# Altium PCB MoonPilor_Power.PcbDoc
Units mil, origin at the board's own origin, x right, y up, seen from the top; angles counter-clockwise.
Board outline 1968.5 x 2362.2 mil, 2 copper layers (Top Layer, Bottom Layer); 63 components, 43 nets, 344 pads, 140 vias.
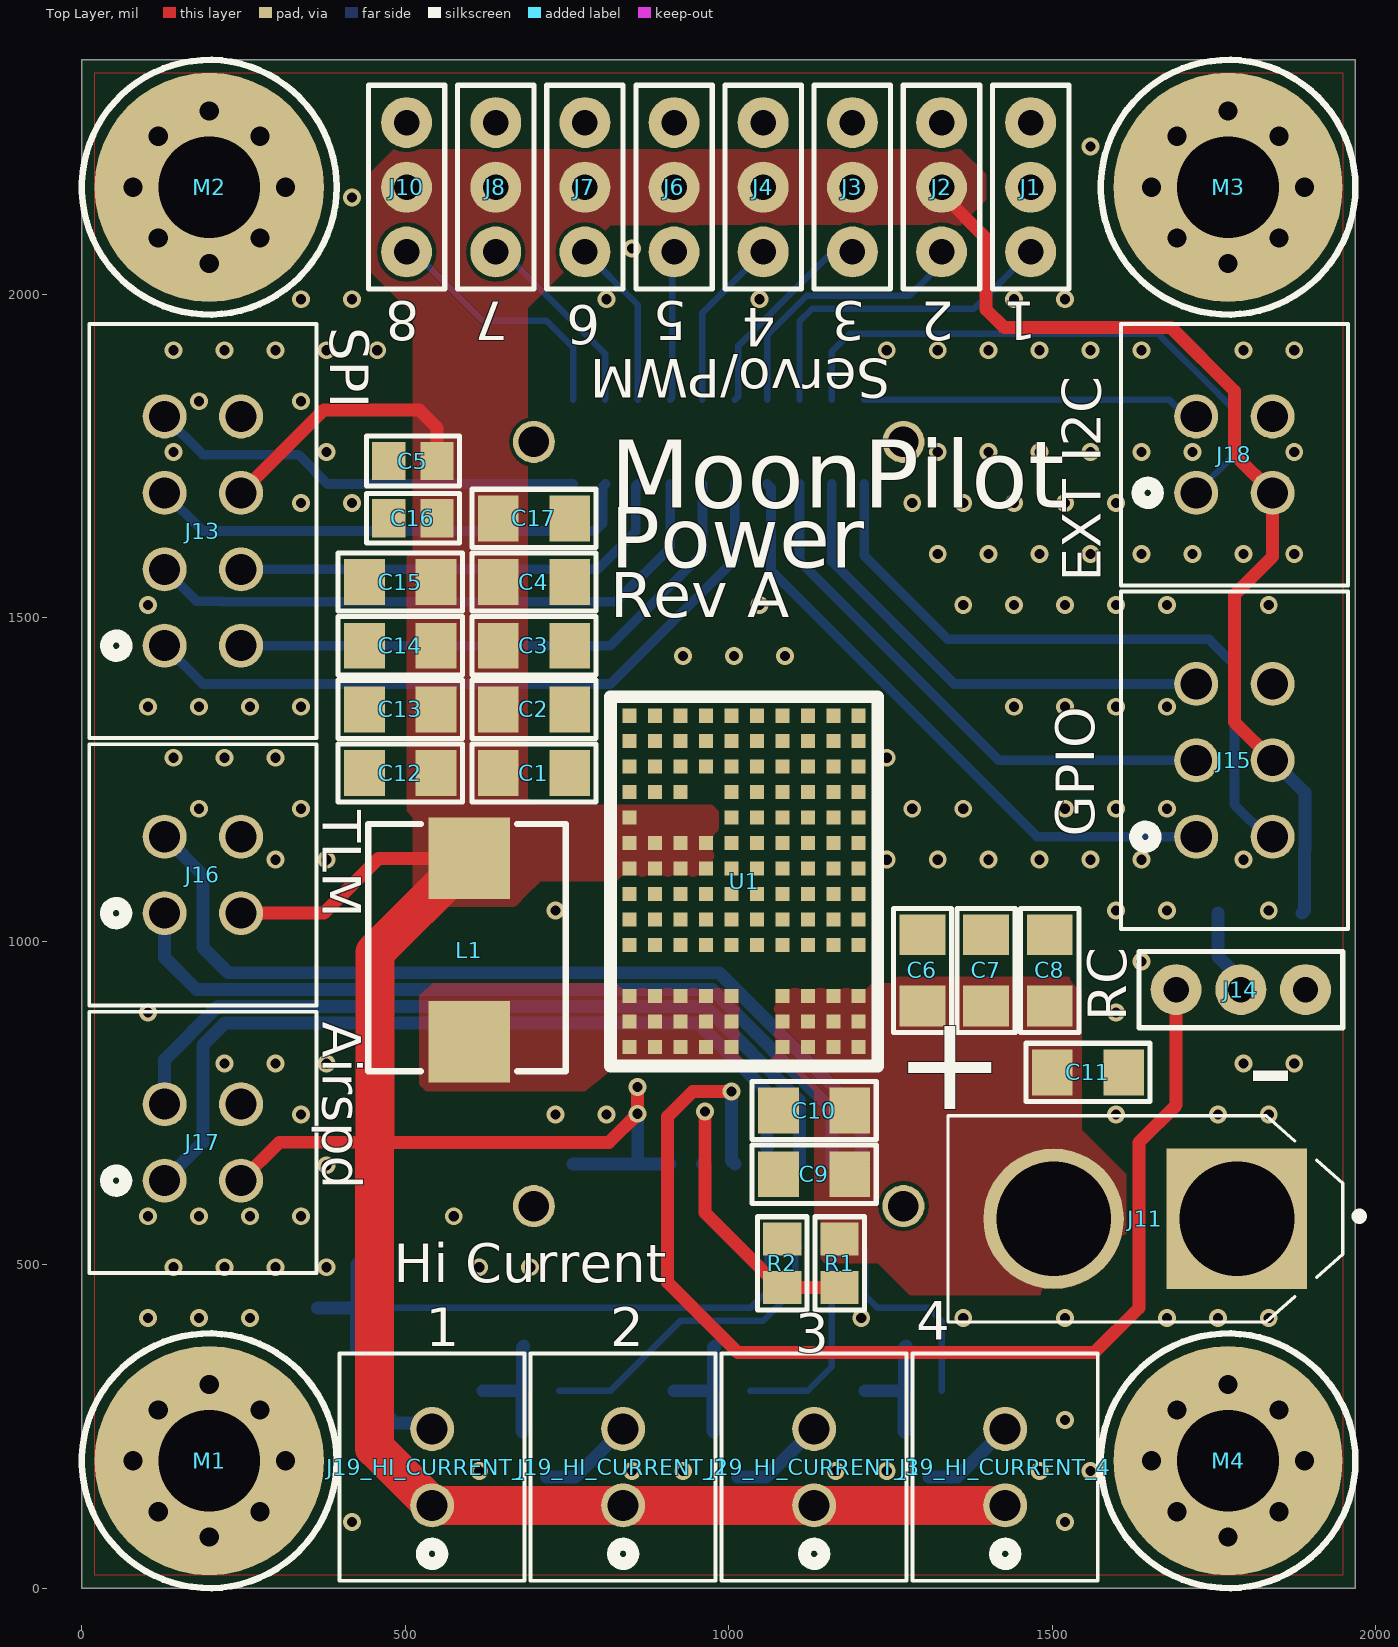
[diagram p0: Top Layer view]
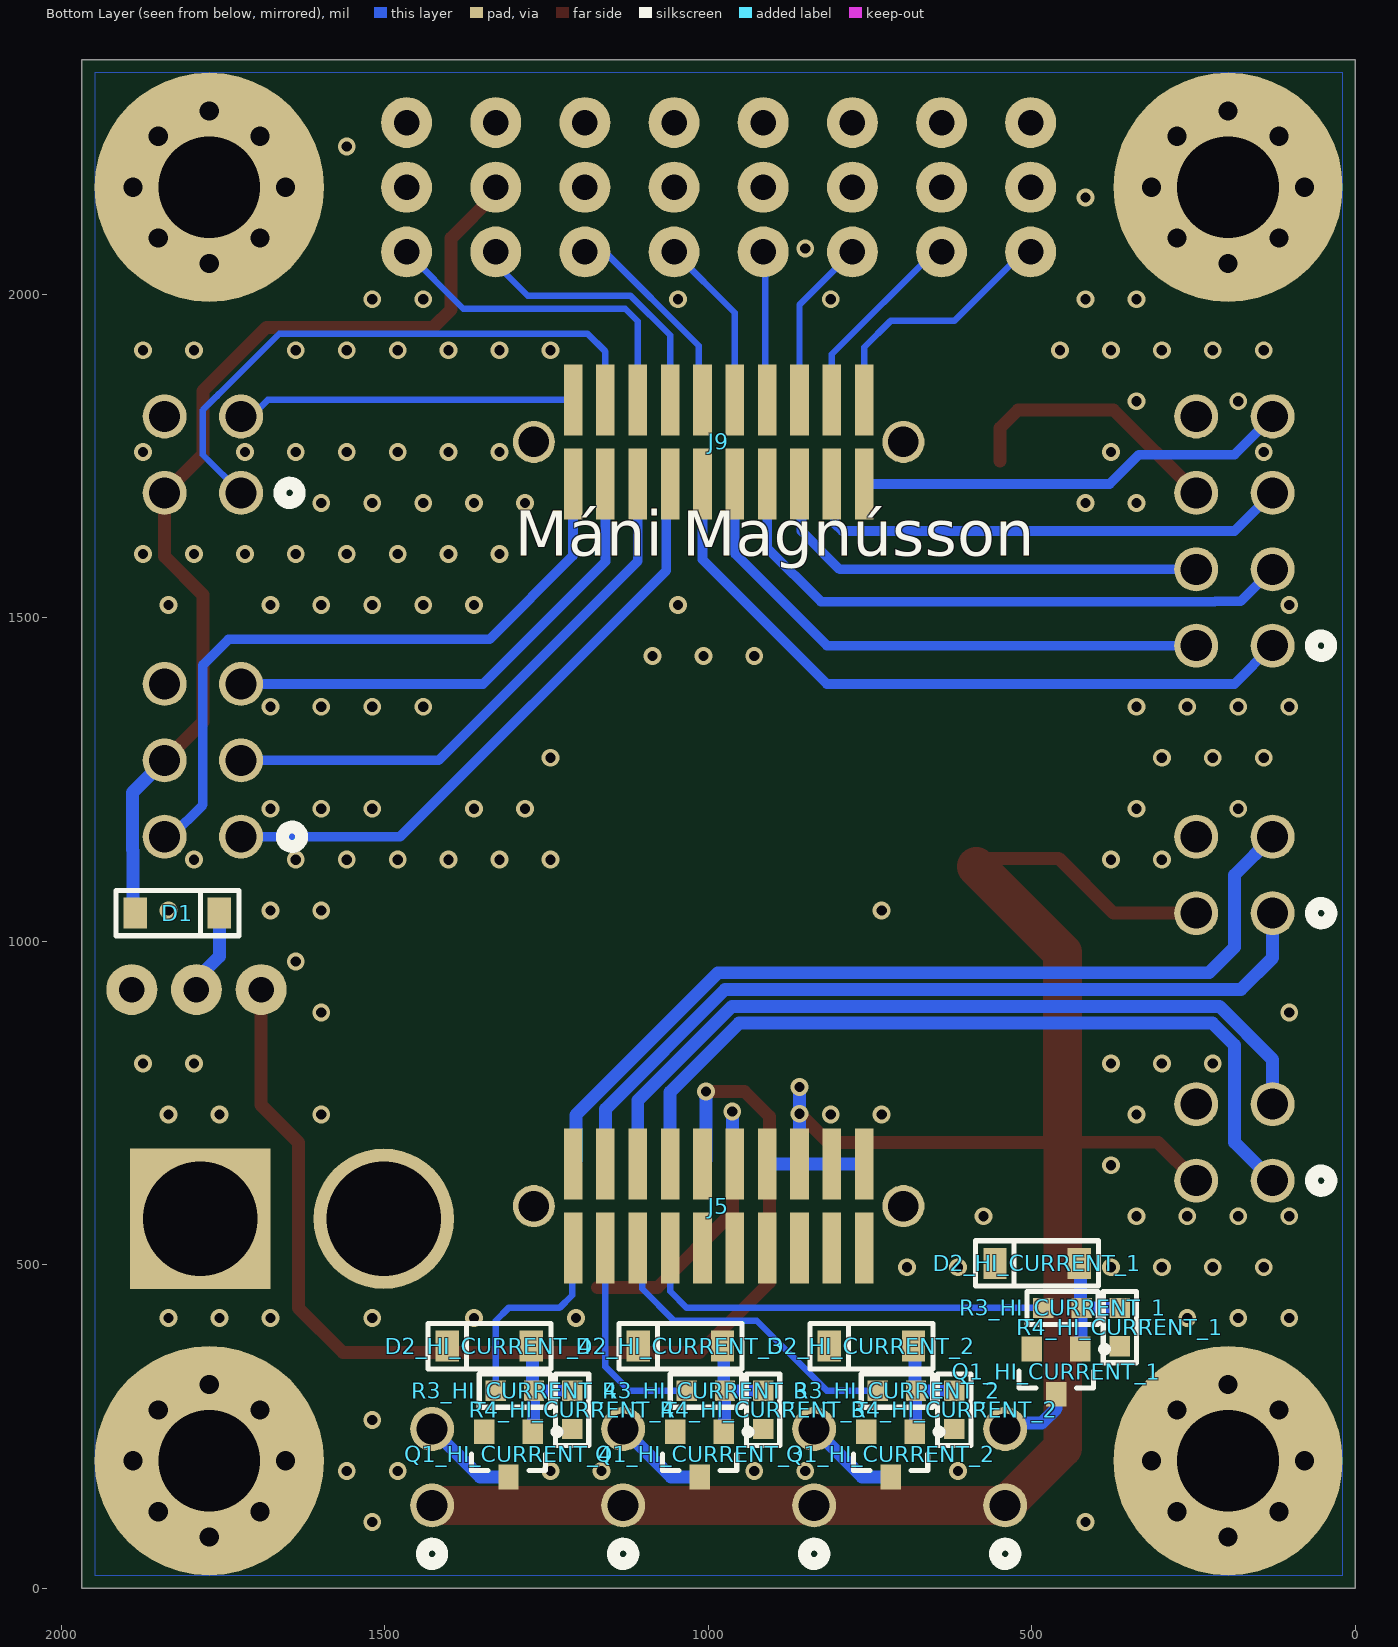
[diagram p1: Bottom Layer view, seen from below]
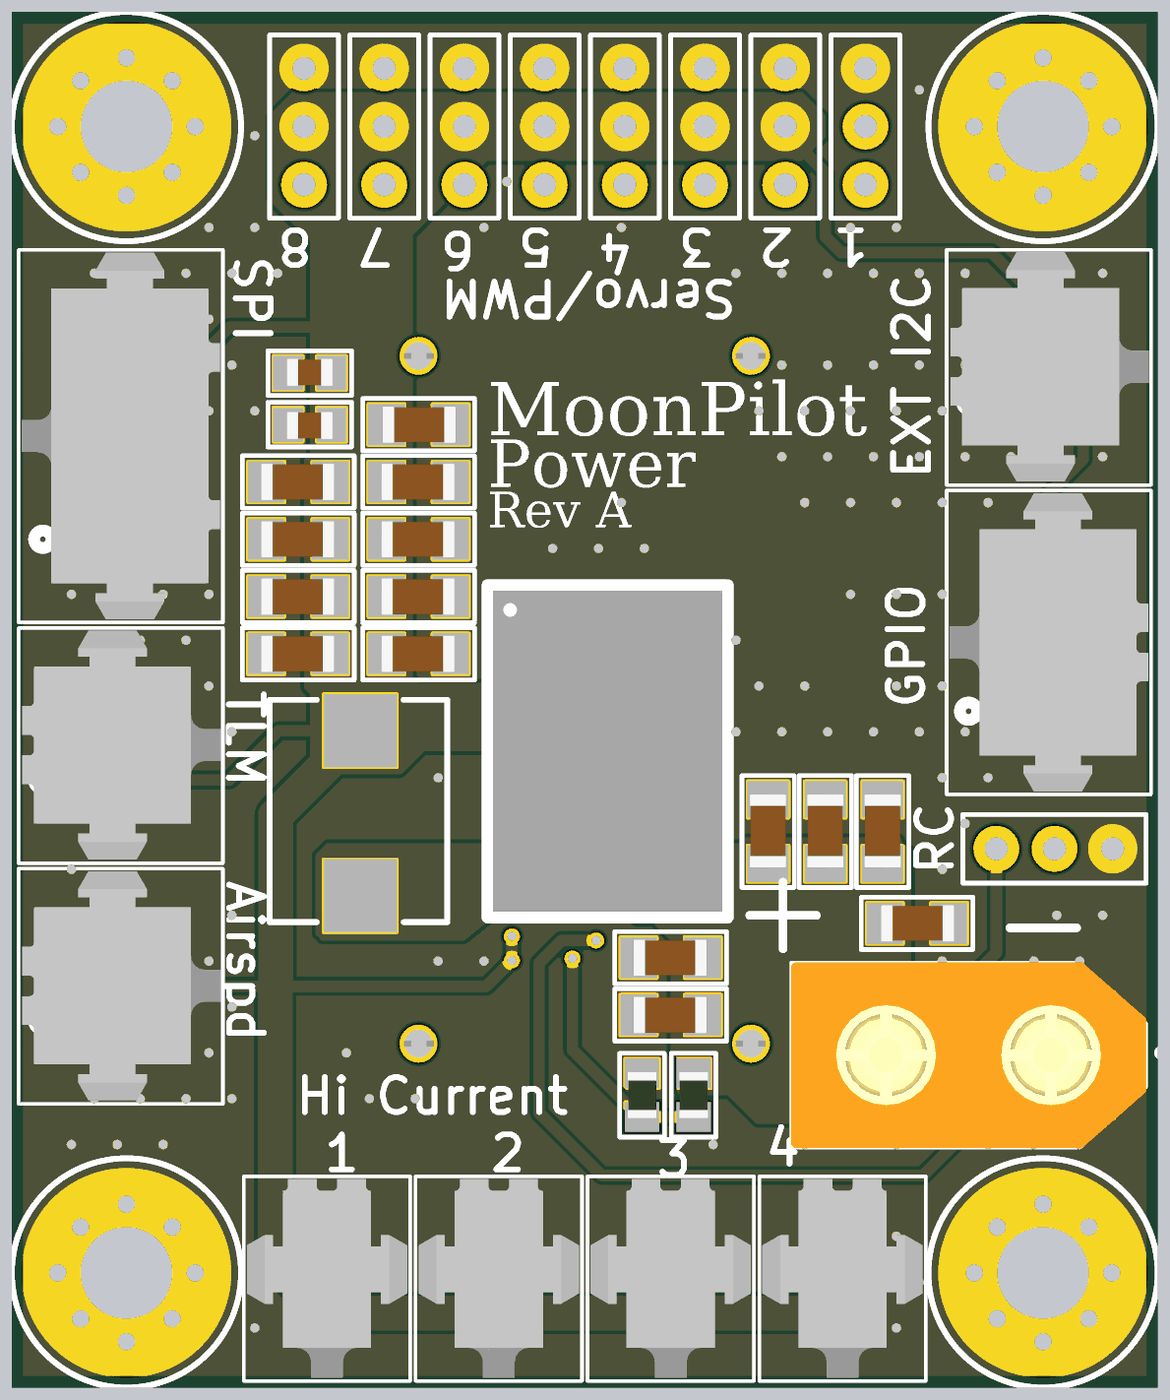
[diagram p2: 3D render of the assembled board from above, using the file's embedded part models]
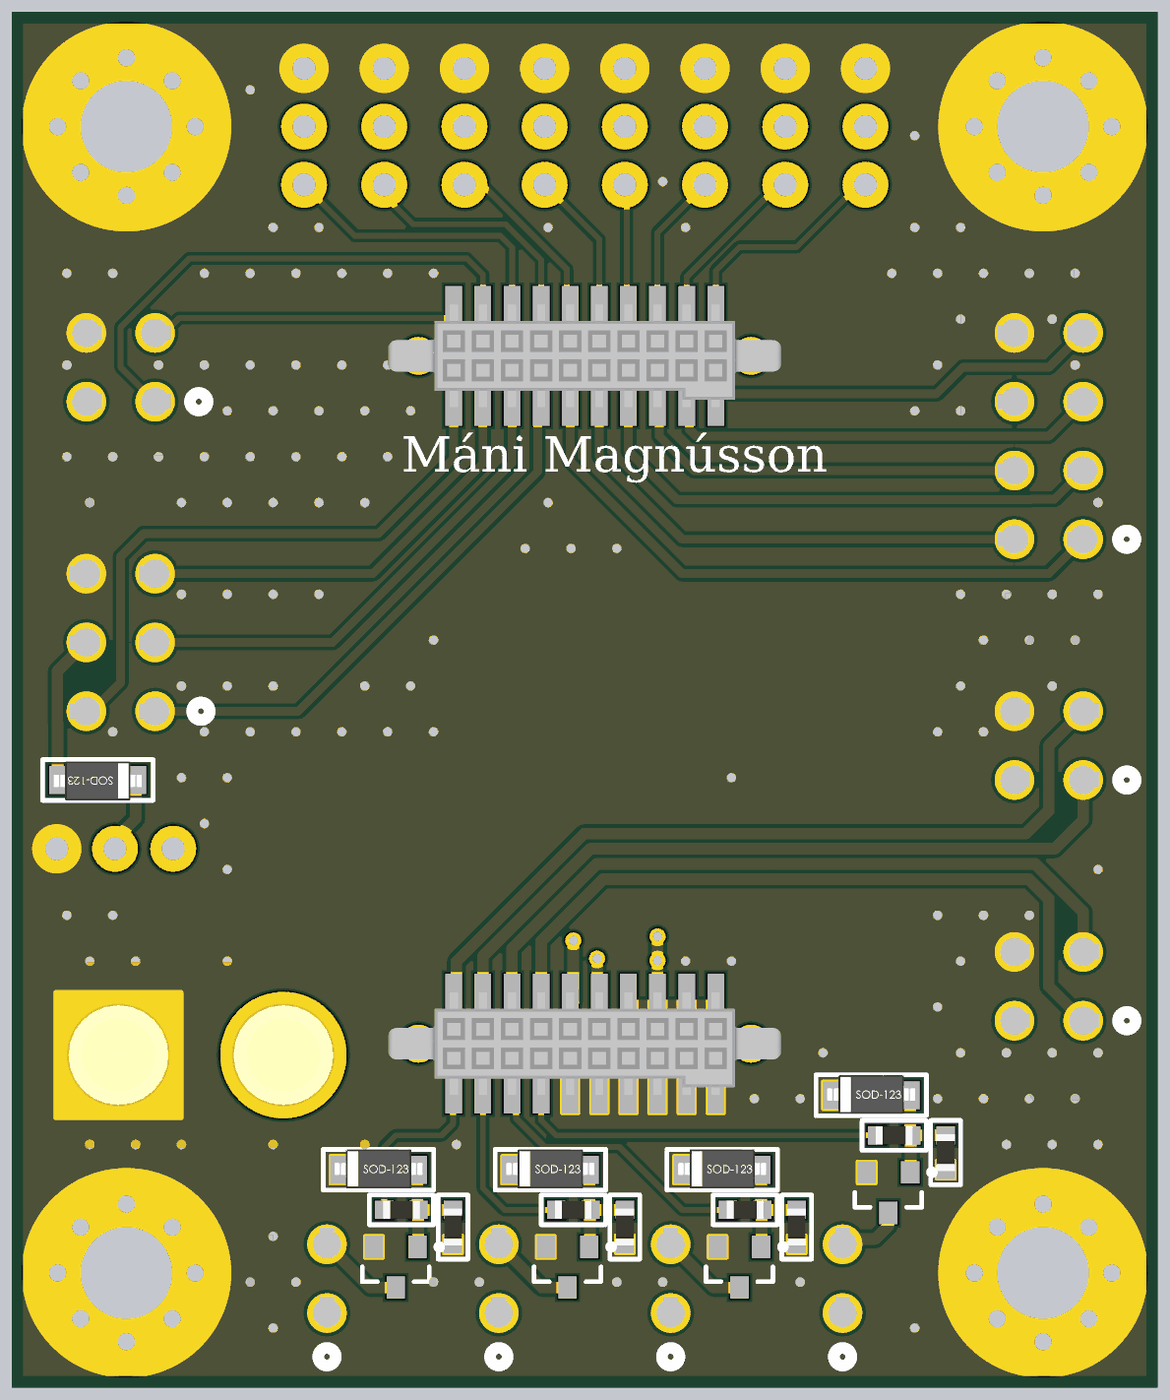
[diagram p3: 3D render of the assembled board from below, using the file's embedded part models]

## Layer stack, top to bottom
Top Solder: solder mask 0.4, Solder Resist, Dk 3.5
Top Layer: signal copper 1.4
Dielectric 1: dielectric 12.6, FR-4, Dk 4.8
Bottom Layer: signal copper 1.4
Bottom Solder: solder mask 0.4, Solder Resist, Dk 3.5

## Board outline
0,0 1968.5,0 1968.5,2362.2 0,2362.2

## Design rules (kind name [scope] priority, off if disabled: settings)
BoardOutlineClearance [All] p1: gap=15 ignorepadtopadclearanceinfootprint=FALSE
Clearance [All] p1: gap=6 ignorepadtopadclearanceinfootprint=FALSE except(0: Arc-Hole Track-Hole SMDPad-Hole THPad-Hole Via-Hole Fill-Hole Poly-Hole Region-Hole Text-Hole)
ComponentClearance [All] p1: gap=1 collisioncheckmode=3 verticalgap=1 showdistances=FALSE
DiffPairsRouting [All] p1: maxlimit=393.7 minlimit=6 mostfreqgap=8 toplayer_minwidth=6 toplayer_maxwidth=15 toplayer_prefwidth=8 bottomlayer_minwidth=6 bottomlayer_maxwidth=15 bottomlayer_prefwidth=8 maxuncoupledlength=500
HoleSize [All] p1: absolutevalues=TRUE maxlimit=265 minlimit=10 maxpercent=80.000 minpercent=20.000
HoleToHoleClearance [All] p1: gap=10 allowstackedmicrovias=FALSE
MinimumAnnularRing [All] p1: minimumring=5
MinimumSolderMaskSliver [All] p1: minsoldermaskwidth=0
PlaneClearance [All] p1: clearance=10
PlaneConnect [All] p1: planeconnectstyle=Direct reliefexpansion=16 reliefentries=4 reliefconductorwidth=6 reliefairgap=6
PolygonConnect [All] p1: connectstyle=Direct reliefconductorwidth=8 reliefentries=4 polygonreliefangle="90 Angle" airgapwidth=6
RoutingCorners [All] p1: cornerstyle=45-Degree minsetback=49.21 maxsetback=49.21
RoutingVias [All] p1: holewidth=11.81 width=27.56 viastyle="Through Hole" minholewidth=10 minwidth=20 maxholewidth=236.22 maxwidth=393.7
SilkToSilkClearance [All] p1: silktosilkclearance=0
SilkToSolderMaskClearance [IsPad] p1: minsilkscreentomaskgap=6 clearancetoexposedcopper=TRUE
SolderMaskExpansion [All] p1: expansion=2.95 istentingtop=FALSE
Width [All] p1: maxlimit=400 minlimit=6 preferedwidth=8
20 further rules are at their usual default settings.

## Classes and differential pairs
channel class Hi_Current: HI_CURRENT_1 HI_CURRENT_2 HI_CURRENT_3 HI_CURRENT_4
net class U1_Nets: +5V GND NetL1_1 NetU1_ADJ NetU1_EAO NetU1_EN NetU1_PGD NetU1_SYNCO NetU1_TRK Vbat
net class R4_HI_CURRENT_4_Nets: GND NetD2_HI_CURRENT_4_1
net class R4_HI_CURRENT_3_Nets: GND NetD2_HI_CURRENT_3_1
net class R4_HI_CURRENT_2_Nets: GND NetD2_HI_CURRENT_2_1
net class R4_HI_CURRENT_1_Nets: GND NetD2_HI_CURRENT_1_1
net class R3_HI_CURRENT_4_Nets: HI_CURRENT_4 NetD2_HI_CURRENT_4_1
net class R3_HI_CURRENT_3_Nets: HI_CURRENT_3 NetD2_HI_CURRENT_3_1
net class R3_HI_CURRENT_2_Nets: HI_CURRENT_2 NetD2_HI_CURRENT_2_1
net class R3_HI_CURRENT_1_Nets: HI_CURRENT_1 NetD2_HI_CURRENT_1_1
net class R2_Nets: BAT_SENS GND
net class R1_Nets: BAT_SENS Vbat
net class Q1_HI_CURRENT_4_Nets: GND NetD2_HI_CURRENT_4_1 NetJ19_HI_CURRENT_4_2
net class Q1_HI_CURRENT_3_Nets: GND NetD2_HI_CURRENT_3_1 NetJ19_HI_CURRENT_3_2
net class Q1_HI_CURRENT_2_Nets: GND NetD2_HI_CURRENT_2_1 NetJ19_HI_CURRENT_2_2
net class Q1_HI_CURRENT_1_Nets: GND NetD2_HI_CURRENT_1_1 NetJ19_HI_CURRENT_1_2
net class M4_Nets: GND
net class M3_Nets: GND
net class M2_Nets: GND
net class M1_Nets: GND
net class L1_Nets: +5V NetL1_1
net class J19_HI_CURRENT_4_Nets: +5V NetJ19_HI_CURRENT_4_2
net class J19_HI_CURRENT_3_Nets: +5V NetJ19_HI_CURRENT_3_2
net class J19_HI_CURRENT_2_Nets: +5V NetJ19_HI_CURRENT_2_2
net class J19_HI_CURRENT_1_Nets: +5V NetJ19_HI_CURRENT_1_2
net class J18_Nets: +5V GND I2C_EXT_SCL I2C_EXT_SDA
net class J17_Nets: +5V GND I2C_SENS_SCL I2C_SENS_SDA
net class J16_Nets: +5V GND UART_SENS_RX UART_SENS_TX
net class J15_Nets: +5V GND GPIO_1 GPIO_2 GPIO_3 GPIO_4
net class J14_Nets: GND NetD1_2 RC_RECEIVER
net class J13_Nets: +5V GND SPI_EXT_CS1 SPI_EXT_CS2 SPI_EXT_CS3 SPI_EXT_MISO SPI_EXT_MOSI SPI_EXT_SCK
net class J11_Nets: GND Vbat
net class J10_Nets: +5V GND PWM_8
net class J9_Nets: GPIO_1 GPIO_2 GPIO_3 GPIO_4 I2C_EXT_SCL I2C_EXT_SDA PWM_1 PWM_2 PWM_3 PWM_4 PWM_5 PWM_6 PWM_7 PWM_8 SPI_EXT_CS1 SPI_EXT_CS2 SPI_EXT_CS3 SPI_EXT_MISO SPI_EXT_MOSI SPI_EXT_SCK
net class J8_Nets: +5V GND PWM_7
net class J7_Nets: +5V GND PWM_6
net class J6_Nets: +5V GND PWM_5
net class J5_Nets: +5V BAT_SENS GND HI_CURRENT_1 HI_CURRENT_2 HI_CURRENT_3 HI_CURRENT_4 I2C_SENS_SCL I2C_SENS_SDA RC_RECEIVER UART_SENS_RX UART_SENS_TX
net class J4_Nets: +5V GND PWM_4
net class J3_Nets: +5V GND PWM_3
net class J2_Nets: +5V GND PWM_2
net class J1_Nets: +5V GND PWM_1
net class D2_HI_CURRENT_4_Nets: GND NetD2_HI_CURRENT_4_1
net class D2_HI_CURRENT_3_Nets: GND NetD2_HI_CURRENT_3_1
net class D2_HI_CURRENT_2_Nets: GND NetD2_HI_CURRENT_2_1
net class D2_HI_CURRENT_1_Nets: GND NetD2_HI_CURRENT_1_1
net class D1_Nets: +5V NetD1_2
net class C17_Nets: +5V GND
net class C16_Nets: +5V GND
net class C15_Nets: +5V GND
net class C14_Nets: +5V GND
net class C13_Nets: +5V GND
net class C12_Nets: +5V GND
net class C11_Nets: GND Vbat
net class C10_Nets: GND Vbat
net class C9_Nets: GND Vbat
net class C8_Nets: GND Vbat
net class C7_Nets: GND Vbat
net class C6_Nets: GND Vbat
net class C5_Nets: +5V GND
net class C4_Nets: +5V GND
net class C3_Nets: +5V GND
net class C2_Nets: +5V GND
net class C1_Nets: +5V GND
component class Main: C1 C2 C3 C4 C5 C6 C7 C8 C9 C10 C11 C12 C13 C14 C15 C16 C17 D1 J1 J2 J3 J4 J5 J6 J7 J8 J9 J10 J11 J13 J14 J15 J16 J17 J18 L1 M1 M2 M3 M4 R1 R2 U1
component class HI_CURRENT_4: D2_HI_CURRENT_4 J19_HI_CURRENT_4 Q1_HI_CURRENT_4 R3_HI_CURRENT_4 R4_HI_CURRENT_4
component class HI_CURRENT_3: D2_HI_CURRENT_3 J19_HI_CURRENT_3 Q1_HI_CURRENT_3 R3_HI_CURRENT_3 R4_HI_CURRENT_3
component class HI_CURRENT_2: D2_HI_CURRENT_2 J19_HI_CURRENT_2 Q1_HI_CURRENT_2 R3_HI_CURRENT_2 R4_HI_CURRENT_2
component class HI_CURRENT_1: D2_HI_CURRENT_1 J19_HI_CURRENT_1 Q1_HI_CURRENT_1 R3_HI_CURRENT_1 R4_HI_CURRENT_1

## Components (designator, comment, footprint, x,y, rotation, side; value= is the part's Value field where it differs from the comment)
C1 "100µF" 1206_CAP 698.82,1259.84 r180 top
C2 "100µF" 1206_CAP 698.82,1358.27 r180 top
C3 "100µF" 1206_CAP 698.82,1456.69 r180 top
C4 "100µF" 1206_CAP 698.82,1555.12 r180 top
C5 "1µF" 0805_cap 511.81,1742.13 r0 top
C6 "22µF" 1206_CAP 1299.21,954.72 r90 top
C7 "22µF" 1206_CAP 1397.64,954.72 r90 top
C8 "22µF" 1206_CAP 1496.06,954.72 r90 top
C9 "22µF" 1206_CAP 1131.89,639.76 r180 top
C10 "22µF" 1206_CAP 1131.89,738.19 r180 top
C11 "22µF" 1206_CAP 1555.12,797.24 r0 top
C12 "100µF" 1206_CAP 492.13,1259.84 r180 top
C13 "100µF" 1206_CAP 492.13,1358.27 r180 top
C14 "100µF" 1206_CAP 492.13,1456.69 r180 top
C15 "100µF" 1206_CAP 492.13,1555.12 r180 top
C16 "1µF" 0805_cap 511.81,1653.54 r180 top
C17 "100nF" 1206_CAP 698.82,1653.54 r0 top
D1 "PMEG3020EH,115" SOD-123 1820.87,1043.31 r180 bottom
D2_HI_CURRENT_1 "TVS Diode" SOD-123 492.13,501.97 r0 bottom (schematic designator D2)
D2_HI_CURRENT_2 "TVS Diode" SOD-123 748.03,374.02 r0 bottom (schematic designator D2)
D2_HI_CURRENT_3 "TVS Diode" SOD-123 1043.31,374.02 r0 bottom (schematic designator D2)
D2_HI_CURRENT_4 "TVS Diode" SOD-123 1338.58,374.02 r0 bottom (schematic designator D2)
J1 "Generic 3 pin 100 mil header" HEADER-3-POS_100_mil 1466.54,2165.35 r90 top locked
J2 "Generic 3 pin 100 mil header" HEADER-3-POS_100_mil 1328.74,2165.35 r90 top locked
J3 "Generic 3 pin 100 mil header" HEADER-3-POS_100_mil 1190.94,2165.35 r90 top locked
J4 "Generic 3 pin 100 mil header" HEADER-3-POS_100_mil 1053.15,2165.35 r90 top locked
J5 "5-104652-2" 5-104652-2 984.25,590.55 r180 bottom locked
J6 "Generic 3 pin 100 mil header" HEADER-3-POS_100_mil 915.35,2165.35 r90 top locked
J7 "Generic 3 pin 100 mil header" HEADER-3-POS_100_mil 777.56,2165.35 r90 top locked
J8 "Generic 3 pin 100 mil header" HEADER-3-POS_100_mil 639.76,2165.35 r90 top locked
J9 "5-104652-2" 5-104652-2 984.25,1771.65 r180 bottom locked
J10 "Generic 3 pin 100 mil header" HEADER-3-POS_100_mil 501.97,2165.35 r90 top locked
J11 "XT-60" XT-60 1643.7,570.87 r180 top locked
J13 "3-794630-8" 3-794630-8 246.06,1811.02 r90 top
J14 "RC_RECEIVER" HEADER-3-POS_100_mil 1791.34,925.2 r0 top locked
J15 "3-794630-6" 3-794630-6 1840.55,1397.64 r90 top
J16 "3-794630-4" 3-794630-4 127.95,1043.31 r270 top
J17 "3-794630-4" 3-794630-4 127.95,629.92 r270 top
J18 "3-794630-4" 3-794630-4 1722.44,1692.91 r270 top
J19_HI_CURRENT_1 "3-794630-2" 3-794630-2 541.34,127.95 r180 top locked (schematic designator J19)
J19_HI_CURRENT_2 "3-794630-2" 3-794630-2 836.61,127.95 r180 top locked (schematic designator J19)
J19_HI_CURRENT_3 "3-794630-2" 3-794630-2 1131.89,127.95 r180 top locked (schematic designator J19)
J19_HI_CURRENT_4 "3-794630-2" 3-794630-2 1427.17,127.95 r180 top locked (schematic designator J19)
L1 "150nH" FPV1006-150-R 598.43,986.22 r90 top
M1 "M4 Hole" M4_SCREW 196.85,196.85 r0 top locked
M2 "M4 Hole" M4_SCREW 196.85,2165.35 r0 top locked
M3 "M4 Hole" M4_SCREW 1771.65,2165.35 r0 top locked
M4 "M4 Hole" M4_SCREW 1771.65,196.85 r0 top locked
Q1_HI_CURRENT_1 "IRLML2502TRPBF" INTR-SOT-23-3_V 462.6,334.65 r0 bottom (schematic designator Q1)
Q1_HI_CURRENT_2 "IRLML2502TRPBF" INTR-SOT-23-3_V 718.5,206.69 r0 bottom (schematic designator Q1)
Q1_HI_CURRENT_3 "IRLML2502TRPBF" INTR-SOT-23-3_V 1013.78,206.69 r0 bottom (schematic designator Q1)
Q1_HI_CURRENT_4 "IRLML2502TRPBF" INTR-SOT-23-3_V 1309.06,206.69 r0 bottom (schematic designator Q1)
R1 "10K" 0805_RES 1171.26,501.97 r270 top
R2 "2K2" 0805_RES 1082.68,501.97 r90 top
R3_HI_CURRENT_1 "220R" 0603_RES 452.76,433.07 r180 bottom (schematic designator R3)
R3_HI_CURRENT_2 "220R" 0603_RES 708.66,305.12 r180 bottom (schematic designator R3)
R3_HI_CURRENT_3 "220R" 0603_RES 1003.94,305.12 r180 bottom (schematic designator R3)
R3_HI_CURRENT_4 "220R" 0603_RES 1299.21,305.12 r180 bottom (schematic designator R3)
R4_HI_CURRENT_1 "10K" 0603_RES 364.17,403.54 r270 bottom (schematic designator R4)
R4_HI_CURRENT_2 "10K" 0603_RES 620.08,275.59 r270 bottom (schematic designator R4)
R4_HI_CURRENT_3 "10K" 0603_RES 915.35,275.59 r270 bottom (schematic designator R4)
R4_HI_CURRENT_4 "10K" 0603_RES 1210.63,275.59 r270 bottom (schematic designator R4)
U1 "PI34xx-00" PI34xx-00 826.77,1368.11 r0 top

## Footprints (in the part's own frame and the unit in brackets; to place one, negate y for a bottom-side part, rotate by r counter-clockwise, add the part's x,y. Pads: shape width x height; smd on the part's side, far side on the other; paste and mask are expansions set on the pad)
3-794630-2 [mil] "2 pin vertical molex connector"
  round 68 hole 48 mask+0: 1(0,0) 2(0,-118.11)
  silkscreen extent -143,-235 143,116, body extent -138,-230 138,111, height 366
3-794630-4 [mil] "4 pin vertical molex connector"
  round 68 hole 48 mask+0: 1(0,0) 2(-118.11,0) 3(0,118.11) 4(-118.11,118.11)
  silkscreen extent -261,-116 143,235, body extent -257,-110 137,231, height 366
3-794630-6 [mil] "6 pin vertical molex connector"
  round 68 hole 48 mask+0: 1(-236.22,118.11) 2(-118.11,118.11) 3(0,118.11) 4(-236.22,0) 5(-118.11,0) 6(0,0)
  silkscreen extent -379,-116 143,235, body extent -374,-112 138,230, height 366
3-794630-8 [mil] "8 pin vertical molex connector"
  round 68 hole 48 mask+0: 1(-354.33,118.11) 2(-236.22,118.11) 3(-118.11,118.11) 4(0,118.11) 5(-354.33,0) 6(-236.22,0) 7(-118.11,0) 8(0,0)
  silkscreen extent -497,-116 143,235, body extent -492,-112 138,230, height 366
5-104652-2 [mm]
  rect 0.73x2.79 smd: 1(5.715,1.65) 2(4.445,1.65) 3(3.175,1.65) 4(1.905,1.65) 5(0.635,1.65) 6(-0.635,1.65) 7(-1.905,1.65) 8(-3.175,1.65) 9(-4.445,1.65) 10(-5.715,1.65) 11(5.715,-1.65) 12(4.445,-1.65) 13(3.175,-1.65) 14(1.905,-1.65) 15(0.635,-1.65) 16(-0.635,-1.65) 17(-1.905,-1.65) 18(-3.175,-1.65) 19(-4.445,-1.65) 20(-5.715,-1.65)
  round 1.65 hole 1.2: 21(-7.255,0) 21(7.255,0)
  body extent -8.58,-2.24 8.59,2.24, height 4.8
0603_RES [mm] "0603 resistor"
  rect 0.8x0.8 smd: 1(-0.75,0) 2(0.75,0)
  silkscreen extent -1.4,-0.65 1.4,0.65, body extent -0.8,-0.4 0.8,0.4, height 0.4
0805_cap [mm] "0805 Capacitor"
  rect 1.3x1.5 smd: 1(-0.95,0) 2(0.95,0)
  silkscreen extent -1.83,-0.97 1.83,0.97, body extent -1,-0.56 1,0.64, height 1.2
0805_RES [mm] "0805 resistor"
  rect 1.3x1.5 smd: 1(-0.95,0) 2(0.95,0)
  silkscreen extent -1.83,-0.97 1.83,0.97, body extent -1,-0.62 1,0.63, height 0.5
1206_CAP [mm] "1206 Capacitor"
  rect 1.6x1.8 smd: 1(-1.4,0) 2(1.4,0)
  silkscreen extent -2.44,-1.14 2.44,1.14, body extent -1.57,-0.8 1.62,0.8, height 1.6
FPV1006-150-R [mm] "Digikey part no. 283-4578-1-ND"
  rect 3.2x3.2 smd: 1(-3.6,0) 2(3.6,0)
HEADER-3-POS_100_mil [mm]
  round 2 hole 1: 1(-2.54,0) 2(0,0) 3(2.54,0)
  silkscreen extent -4,-1.5 4,1.5
INTR-SOT-23-3_V [mm] "SOT23, 3-Leads, Body 2.92x1.3mm, Pitch 1.9mm"
  rect 0.802x0.972 smd: 1(-0.95,-0.885) 2(0.95,-0.885) 3(0,0.885)
  silkscreen extent -2.03,-1.01 1.46,0.64, body extent -1.46,-0.65 1.46,0.65, height 1.12
M4_SCREW [mm]
  round 2 hole 0.75: 1(-3,0) 1(-2,-2) 1(-2,2) 1(0,-3) 1(0,3) 1(2,-2) 1(2,2) 1(3,0)
  round 9 hole 4: 1(0,0)
  silkscreen extent -5,-5 5,5
PI34xx-00 [mm] "Vicor PI34xx-00 ZVS buck converter"
  rect 0.55x0.55 smd paste-0.1: ADJ(1.5,-0.5) ADRI(7.5,-0.5) ADRO(6.5,-0.5) EAO(0.5,-1.5) EN(0.5,-2.5) NC(0.5,-3.5) PGD(0.5,-0.5) PGND(0.5,-9.5) PGND(0.5,-8.5) PGND(0.5,-7.5) PGND(1.5,-9.5) PGND(1.5,-8.5) PGND(1.5,-7.5) PGND(2.5,-9.5) PGND(2.5,-8.5) PGND(2.5,-7.5) PGND(3.5,-9.5) PGND(3.5,-8.5) PGND(3.5,-7.5) PGND(4.5,-9.5) PGND(4.5,-8.5) PGND(4.5,-7.5) PGND(4.5,-6.5) PGND(4.5,-5.5) PGND(4.5,-4.5) PGND(4.5,-3.5) PGND(5.5,-9.5) PGND(5.5,-8.5) PGND(5.5,-7.5) PGND(5.5,-6.5) PGND(5.5,-5.5) PGND(5.5,-4.5) PGND(5.5,-3.5) PGND(6.5,-9.5) PGND(6.5,-8.5) PGND(6.5,-7.5) PGND(6.5,-6.5) PGND(6.5,-5.5) PGND(6.5,-4.5) PGND(6.5,-3.5) PGND(7.5,-9.5) PGND(7.5,-8.5) PGND(7.5,-7.5) PGND(7.5,-6.5) PGND(7.5,-5.5) PGND(7.5,-4.5) PGND(7.5,-3.5) PGND(8.5,-9.5) PGND(8.5,-8.5) PGND(8.5,-7.5) PGND(8.5,-6.5) PGND(8.5,-5.5) PGND(8.5,-4.5) PGND(8.5,-3.5) PGND(9.5,-9.5) PGND(9.5,-8.5) PGND(9.5,-7.5) PGND(9.5,-6.5) PGND(9.5,-5.5) REM(0.5,-4.5) SCL(4.5,-0.5) SDA(3.5,-0.5) SGND(1.5,-3.5) SGND(1.5,-2.5) SGND(1.5,-1.5) SGND(2.5,-3.5) SGND(2.5,-2.5) SGND(2.5,-1.5) SGND(3.5,-2.5) SGND(3.5,-1.5) SGND(4.5,-2.5) SGND(4.5,-1.5) SGND(5.5,-2.5) SGND(5.5,-1.5) SGND(5.5,-0.5) SGND(6.5,-2.5) SGND(6.5,-1.5) SGND(7.5,-2.5) SGND(7.5,-1.5) SGND(8.5,-2.5) SGND(8.5,-1.5) SGND(8.5,-0.5) SGND(9.5,-1.5) SGND(9.5,-0.5) SYNCI(9.5,-4.5) SYNCO(9.5,-3.5) TRK(2.5,-0.5) VDR(9.5,-2.5) VIN(6.5,-13.5) VIN(6.5,-12.5) VIN(6.5,-11.5) VIN(7.5,-13.5) VIN(7.5,-12.5) VIN(7.5,-11.5) VIN(8.5,-13.5) VIN(8.5,-12.5) VIN(8.5,-11.5) VIN(9.5,-13.5) VIN(9.5,-12.5) VIN(9.5,-11.5) VOUT(0.5,-6.5) VOUT(0.5,-5.5) VOUT(1.5,-6.5) VOUT(1.5,-5.5) VOUT(2.5,-6.5) VOUT(2.5,-5.5) VOUT(3.5,-6.5) VOUT(3.5,-5.5) VS1(0.5,-13.5) VS1(0.5,-12.5) VS1(0.5,-11.5) VS1(1.5,-13.5) VS1(1.5,-12.5) VS1(1.5,-11.5) VS1(2.5,-13.5) VS1(2.5,-12.5) VS1(2.5,-11.5) VS1(3.5,-13.5) VS1(3.5,-12.5) VS1(3.5,-11.5) VS1(4.5,-13.5) VS1(4.5,-12.5) VS1(4.5,-11.5)
  silkscreen extent -0.25,-14.25 10.25,0.25, body extent 0,-14 10,0, height 2.62
SOD-123 [mm]
  rect 0.92x1.22 smd: 1(-1.651,0) 2(1.651,0)
  silkscreen extent -2.41,-0.89 2.41,0.89, body extent -1.92,-0.89 1.93,0.81, height 1.42
XT-60 [mm]
  round 5.516 hole 4.5: 1(3.6,0)
  rect 5.516x5.516 hole 4.5: 2(-3.6,0)
  silkscreen extent -8.55,-4.05 7.75,4.05, body extent -7.75,-4.05 7.75,4.05, height 16

## Part data
C1 C2 C3 C4 C5 C6 C7 C8 C9 C10 C11 C12 C13 C14 C15 C16 C17: library part Capacitor
D1: library part "Schottky diode", "Digikey part no. 1727-3873-1-ND"
D2_HI_CURRENT_1 D2_HI_CURRENT_2 D2_HI_CURRENT_3 D2_HI_CURRENT_4: "PTVS3V3S1UR,115 / Digikey part no. 1727-5228-1-ND"
J1 J2 J3 J4 J6 J7 J8 J10 J14: library part "3 pin 100 mil header"
J5 J9: library part "20 pin vertical board to board female", "Digikey part no. A33547-ND / 1.27mm female board to board connector, 2 row"
J11: "Digikey part no. 1568-1816-ND"
J13: library part "8 pin vertical molex", "Digikey part no. A33222-ND", Built_By=EMA_UL_Team, Copyright="Copyright (C) 2018 Accelerated Designs. All rights reserved", Manufacturer_Part_Number=3-794630-8, RefDes=RefDes, SourceLibrary=Tyco_2012-04-26, Type=DEV, Vendor="TE Connectivity"
J15: library part "6 pin vertical molex", "Digikey part no. A33221-ND", Built_By=EMA_UL_Team, Copyright="Copyright (C) 2018 Accelerated Designs. All rights reserved", Manufacturer_Part_Number=3-794630-6, RefDes=RefDes, SourceLibrary=Tyco_2012-04-26, Type=DEV, Vendor="TE Connectivity"
J16 J17 J18: library part "4 pin vertical molex", "Digikey part no. A33220-ND", Built_By=EMA_UL_Team, Copyright="Copyright (C) 2016 Accelerated Designs. All rights reserved", Manufacturer_Part_Number=3-794630-4, PITCH(MM)=3, POSITIONS=4, PRODUCT=Header, RefDes=RefDes, ROWS/CONFIG=2, SourceLibrary=TE_Connectivity-2018-03-16, TE_Part_Number=3-794630-4, Type=DEV, Vendor="TE Connectivity"
J19_HI_CURRENT_1 J19_HI_CURRENT_2 J19_HI_CURRENT_3 J19_HI_CURRENT_4: library part "2 pin vertical molex", "Digikey part no. A33219-ND", Built_By=EMA_UL_Team, Copyright="Copyright (C) 2018 Accelerated Designs. All rights reserved", Manufacturer_Part_Number=3-794630-2, RefDes=RefDes, SourceLibrary=Tyco_2012-04-26, Type=DEV, Vendor="TE Connectivity"
L1: library part Inductor
Q1_HI_CURRENT_1 Q1_HI_CURRENT_2 Q1_HI_CURRENT_3 Q1_HI_CURRENT_4: "N-Channel HEXFET(R) Power MOSFET, 20 V VDS, +/- 12 V VGS, 4.2 A, 3-Pin SOT23, RoHS, Tape and Reel", Drain-Source On Resistance-Max=0.045O, Drain-to-Source Voltage [Vdss]=20V, Manufacturer="International Rectifier", Package Description="3-Pin Small Outline Transistor, Body 2.92 x 1.3 mm, Pitch 0.95 mm", Package Reference=SOT-23-3, Rated Power Dissipation=1.25W, Channel Type=N-Channel, Datasheet URL=https://datasheet.ciiva.com/6383/irlml2502pbf-6383216.pdf, Datasheet Version=Apr-14, Manufacturer URL=http://internationalrectifier.com/, Qg Gate Charge=8nC
R1 R2 R3_HI_CURRENT_1 R3_HI_CURRENT_2 R3_HI_CURRENT_3 R3_HI_CURRENT_4 R4_HI_CURRENT_1 R4_HI_CURRENT_2 R4_HI_CURRENT_3 R4_HI_CURRENT_4: library part Resistor
U1: "Digikey part no. 1102-1641-ND"

## Via types
v1: diameter 27.56, hole 15.75, Top Layer to Bottom Layer, tented both sides, 136 vias
v2: diameter 27.56, hole 15.75, Top Layer to Bottom Layer, 4 vias

## Nets (pads, with @x,y where several pads share a name; then routed paths per layer and width w, separated by ;. In a path a pad name is that pad's centre, name@x,y a point inside that pad or via, vN(x,y) a via of type N, cw(c..) or ccw(c..) an arc to the next point about the centre after c; other vN are vias at no path point)
+5V: C1.2 C2.2 C3.2 C4.2 C5.2 C12.1 C13.1 C14.1 C15.1 C16.1 C17.1 D1.1 J2.2 J3.2 J4.2 J5.1 J5.2 J5.3 J5.4 J6.2 J7.2 J8.2 J10.2 J13.7 J15.5 J16.3 J17.3 J18.3 J19_HI_CURRENT_1.1 J19_HI_CURRENT_2.1 J19_HI_CURRENT_3.1 J19_HI_CURRENT_4.1 L1.2 U1.REM U1.VOUT | length 5320.1
  Top Layer w20: J17.3 305.36,689.22 452.51,689.22 452.76,688.98 ; J16.3 374.02,1043.31 458.66,1127.95 L1.2@585.95,1127.95 ; J13.7 374.02,1820.87 521.65,1820.87 549.21,1793.31 C5.2 ; 433.07,688.98 452.51,688.98 452.76,688.98 ; v2(859.07,774.79) v2(859.07,733.38) 814.67,688.98 452.76,688.98 ; J2.2 1328.74,2155.51 1397.64,2086.61 1397.64,1976.38 1425.2,1948.82 1683.07,1948.82 1781.5,1850.39 1781.5,1751.97 J18.3 1840.55,1594.49 1781.5,1535.43 1781.5,1338.58 J15.5
  Top Layer w25: 452.76,688.98 453,689.22 ; L1.2@585.95,1115.48 L1.2
  Top Layer w60: 452.51,689.22 452.51,688.98 452.51,216.78 J19_HI_CURRENT_1.1 J19_HI_CURRENT_2.1 J19_HI_CURRENT_3.1 J19_HI_CURRENT_4.1 ; 453,689.22 453,982.53 L1.2@585.95,1115.48
  Bottom Layer w20: J5.1 J5.2 J5.3 ; v2(859.07,774.79) v2(859.07,733.38) 859.25,733.19 J5.3 ; J5.4 J5.3 ; J15.5 1890.55,1229.53 1890.55,1140.71 1889.76,1139.92 1889.76,1047.2 D1.1
BAT_SENS: J5.5 R1.2 R2.1 | length 495.4
  Top Layer w20: v2(963.12,736.74) 963.12,580.19 1078.74,464.57 R2.1 R1.2
  Bottom Layer w20: J5.5 963.12,659.38 v2(963.12,736.74)
GND: C1.1 C2.1 C3.1 C4.1 C5.1 C6.2 C7.2 C8.2 C9.2 C10.2 C11.2 C12.2 C13.2 C14.2 C15.2 C16.2 C17.2 D2_HI_CURRENT_1.2 D2_HI_CURRENT_2.2 D2_HI_CURRENT_3.2 D2_HI_CURRENT_4.2 J1.3 J2.3 J3.3 J4.3 J5.11 J5.12 J5.13 J5.14 J5.15 J5.16 J6.3 J7.3 J8.3 J10.3 J11.2 J13.8 J14.3 J15.6 J16.4 J17.4 J18.4 M1.1 M2.1 M3.1 M4.1 Q1_HI_CURRENT_1.2 Q1_HI_CURRENT_2.2 Q1_HI_CURRENT_3.2 Q1_HI_CURRENT_4.2 R2.2 R4_HI_CURRENT_1.2 R4_HI_CURRENT_2.2 R4_HI_CURRENT_3.2 R4_HI_CURRENT_4.2 U1.PGND U1.SGND U1.SYNCI
  other v1: 417.32,102.36 1519.69,102.36 614.17,181.1 850.39,181.1 929.13,181.1 1165.36,181.1 1244.1,181.1 1480.32,181.1 1559.06,181.1 1519.69,259.84 102.36,417.32 181.1,417.32 259.84,417.32 1204.73,417.32 1362.21,417.32 1519.69,417.32 1677.17,417.32 1755.91,417.32 1834.65,417.32 141.73,496.06 220.47,496.06 299.21,496.06 377.95,496.06 614.17,496.06 692.91,496.06 102.36,574.8 181.1,574.8 259.84,574.8 338.58,574.8 574.8,574.8 377.95,653.54 338.58,732.28 732.28,732.28 811.02,732.28 1598.43,732.28 1755.91,732.28 1834.65,732.28 220.47,811.02 299.21,811.02 377.95,811.02 1795.28,811.02 1874.02,811.02 102.36,889.76 1598.43,889.76 1637.8,968.51 732.28,1047.25 1598.43,1047.25 1677.17,1047.25 1834.65,1047.25 299.21,1125.99 377.95,1125.99 1244.1,1125.99 1322.84,1125.99 1401.58,1125.99 1480.32,1125.99 1559.06,1125.99 1637.8,1125.99 1795.28,1125.99 181.1,1204.73 338.58,1204.73 1283.47,1204.73 1362.21,1204.73 1519.69,1204.73 1598.43,1204.73 1677.17,1204.73 141.73,1283.47 220.47,1283.47 299.21,1283.47 1244.1,1283.47 102.36,1362.21 181.1,1362.21 259.84,1362.21 338.58,1362.21 1440.95,1362.21 1519.69,1362.21 1598.43,1362.21 1677.17,1362.21 929.13,1440.95 1007.88,1440.95 1086.62,1440.95 102.36,1519.69 1047.25,1519.69 1362.21,1519.69 1440.95,1519.69 1519.69,1519.69 1598.43,1519.69 1677.17,1519.69 1834.65,1519.69 1322.84,1598.43 1401.58,1598.43 1480.32,1598.43 1559.06,1598.43 1637.8,1598.43 1716.54,1598.43 1795.28,1598.43 1874.02,1598.43 338.58,1677.17 417.32,1677.17 1283.47,1677.17 1362.21,1677.17 1440.95,1677.17 1519.69,1677.17 1598.43,1677.17 141.73,1755.91 377.95,1755.91 1322.84,1755.91 1401.58,1755.91 1480.32,1755.91 1559.06,1755.91 1637.8,1755.91 1716.54,1755.91 1874.02,1755.91 181.1,1834.65 338.58,1834.65 141.73,1913.39 220.47,1913.39 299.21,1913.39 377.95,1913.39 456.69,1913.39 1244.1,1913.39 1322.84,1913.39 1401.58,1913.39 1480.32,1913.39 1559.06,1913.39 1637.8,1913.39 1795.28,1913.39 1874.02,1913.39 338.58,1992.13 417.32,1992.13 811.02,1992.13 1047.25,1992.13 1440.95,1992.13 1519.69,1992.13 850.39,2070.87 417.32,2149.61 1559.06,2228.35
GPIO_1: J9.17 J15.1 | length 964.1
  Bottom Layer w15: J9.17 1065.18,1700.76 1065.18,1572.61 1476.38,1161.42 J15.1
GPIO_2: J9.18 J15.2 | length 859.9
  Bottom Layer w15: J9.18 1109.25,1587.6 1417.32,1279.53 J15.2
GPIO_3: J9.19 J15.3 | length 761.4
  Bottom Layer w15: J9.19 1159.25,1586.81 1348.43,1397.64 J15.3
GPIO_4: J9.20 J15.4 | length 1048.9
  Bottom Layer w15: J9.20 1209.25,1595.87 1338.58,1466.54 1742.13,1466.54 1781.5,1427.17 1781.5,1210.63 1830.71,1161.42 J15.4
HI_CURRENT_1: J5.17 R3_HI_CURRENT_1.1 | length 654.4
  Bottom Layer w10: R3_HI_CURRENT_1.1 1033.46,433.07 1059.25,458.86 J5.17
HI_CURRENT_2: J5.18 R3_HI_CURRENT_2.1 | length 495.2
  Bottom Layer w10: R3_HI_CURRENT_2.1 816.93,305.12 925.2,413.39 1053.15,413.39 1102.36,462.6 1102.36,518.7 J5.18
HI_CURRENT_3: J5.19 R3_HI_CURRENT_3.1 | length 324.5
  Bottom Layer w10: R3_HI_CURRENT_3.1 1122.05,305.12 1159.25,342.32 J5.19
HI_CURRENT_4: J5.20 R3_HI_CURRENT_4.1 | length 316.1
  Bottom Layer w10: J5.20 1210.63,524.21 1210.63,452.76 1230.31,433.07 1309.06,433.07 1328.74,413.39 R3_HI_CURRENT_4.1
I2C_EXT_SCL: J9.9 J18.1 | length 909.7
  Bottom Layer w10: J9.9 1159.25,1911.27 1186.96,1938.98 1663.39,1938.98 1753.18,1849.18 cw(c1722.44,1811.02) 1760.6,1841.76 1781.5,1820.87 1781.5,1751.97 J18.1
I2C_EXT_SDA: J9.10 J18.2 | length 523.8
  Bottom Layer w10: J9.10 1681.16,1836.61 1706.75,1811.02 J18.2
I2C_SENS_SCL: J5.7 J17.1 | length 1275.4
  Bottom Layer w20: J17.1 187.01,688.98 187.01,839.21 220.99,873.2 952.87,873.2 1059.25,766.82 J5.7
I2C_SENS_SDA: J5.8 J17.2 | length 1242.7
  Bottom Layer w20: J17.2 127.95,816.93 210.22,899.2 963.64,899.2 1109.25,753.58 J5.8
NetD1_2: D1.2 J14.2 | length 132.8
  Bottom Layer w20: D1.2 1755.87,976.56 1791.34,941.09 J14.2
NetD2_HI_CURRENT_1_1: D2_HI_CURRENT_1.1 Q1_HI_CURRENT_1.1 R3_HI_CURRENT_1.2 R4_HI_CURRENT_1.1 | length 194
  Bottom Layer w20: R4_HI_CURRENT_1.1 R3_HI_CURRENT_1.2 ; Q1_HI_CURRENT_1.1 424.21,370.47 424.21,432.09 R3_HI_CURRENT_1.2 ; D2_HI_CURRENT_1.1 425.18,500.02 425.18,435.02 R3_HI_CURRENT_1.2
NetD2_HI_CURRENT_2_1: D2_HI_CURRENT_2.1 Q1_HI_CURRENT_2.1 R3_HI_CURRENT_2.2 R4_HI_CURRENT_2.1 | length 194
  Bottom Layer w20: R4_HI_CURRENT_2.1 R3_HI_CURRENT_2.2 ; Q1_HI_CURRENT_2.1 680.12,242.52 680.12,304.13 R3_HI_CURRENT_2.2 ; D2_HI_CURRENT_2.1 681.08,372.07 681.08,307.07 R3_HI_CURRENT_2.2
NetD2_HI_CURRENT_3_1: D2_HI_CURRENT_3.1 Q1_HI_CURRENT_3.1 R3_HI_CURRENT_3.2 R4_HI_CURRENT_3.1 | length 194
  Bottom Layer w20: R4_HI_CURRENT_3.1 R3_HI_CURRENT_3.2 ; Q1_HI_CURRENT_3.1 975.39,242.52 975.39,304.13 R3_HI_CURRENT_3.2 ; D2_HI_CURRENT_3.1 976.36,372.07 976.36,307.07 R3_HI_CURRENT_3.2
NetD2_HI_CURRENT_4_1: D2_HI_CURRENT_4.1 Q1_HI_CURRENT_4.1 R3_HI_CURRENT_4.2 R4_HI_CURRENT_4.1 | length 194
  Bottom Layer w20: R4_HI_CURRENT_4.1 R3_HI_CURRENT_4.2 ; Q1_HI_CURRENT_4.1 1270.67,242.52 1270.67,304.13 R3_HI_CURRENT_4.2 ; D2_HI_CURRENT_4.1 1271.63,372.07 1271.63,307.07 R3_HI_CURRENT_4.2
NetJ19_HI_CURRENT_1_2: J19_HI_CURRENT_1.2 Q1_HI_CURRENT_1.3 | length 114.1
  Bottom Layer w20: Q1_HI_CURRENT_1.3 462.6,277.46 484.81,255.25 532.15,255.25 J19_HI_CURRENT_1.2
NetJ19_HI_CURRENT_2_2: J19_HI_CURRENT_2.2 Q1_HI_CURRENT_2.3 | length 148.9
  Bottom Layer w20: Q1_HI_CURRENT_2.3 762.4,171.85 J19_HI_CURRENT_2.2
NetJ19_HI_CURRENT_3_2: J19_HI_CURRENT_3.2 Q1_HI_CURRENT_3.3 | length 148.9
  Bottom Layer w20: Q1_HI_CURRENT_3.3 1057.68,171.85 J19_HI_CURRENT_3.2
NetJ19_HI_CURRENT_4_2: J19_HI_CURRENT_4.2 Q1_HI_CURRENT_4.3 | length 148.9
  Bottom Layer w20: Q1_HI_CURRENT_4.3 1352.95,171.85 J19_HI_CURRENT_4.2
NetL1_1: L1.1 U1.VS1
PWM_1: J1.1 J9.8 | length 523.3
  Bottom Layer w10: J9.8 1109.25,1958.2 1128.77,1977.72 1378.9,1977.72 J1.1
PWM_2: J2.1 J9.7 | length 433.3
  Bottom Layer w10: J9.7 1059.25,1936.48 1120.49,1997.72 1279.21,1997.72 1328.74,2047.24 J2.1
PWM_3: J3.1 J9.6 | length 322.2
  Bottom Layer w10: J9.6 1014.85,1842.21 1014.85,1920.36 1159.84,2065.35 J3.1
PWM_4: J4.1 J9.5 | length 267.6
  Bottom Layer w10: J9.5 959.25,1971.46 J4.1
PWM_5: J6.1 J9.4 | length 231.3
  Bottom Layer w10: J9.4 912.3,1839.67 912.3,2062.3 J6.1
PWM_6: J7.1 J9.3 | length 262.6
  Bottom Layer w10: J7.1 859.25,1983.66 J9.3
PWM_7: J8.1 J9.2 | length 305.6
  Bottom Layer w10: J8.1 651.18,2065.35 809.25,1907.28 J9.2
PWM_8: J9.1 J10.1 | length 399.7
  Bottom Layer w10: J10.1 513.39,2065.35 620.08,1958.66 718.5,1958.66 759.25,1917.91 J9.1
RC_RECEIVER: J5.6 J14.1 | length 1803.1
  Top Layer w20: v2(1003.94,767.72) 944.27,767.72 905.51,728.96 905.51,472.44 1013.78,364.17 1564.96,364.17 1633.86,433.07 1633.86,688.98 1691.34,746.46 J14.1
  Bottom Layer w20: v2(1003.94,767.72) 1003.94,660.83 J5.6
SPI_EXT_CS1: J9.11 J13.4 | length 674.5
  Bottom Layer w15: J13.4 187.01,1751.97 334.65,1751.97 379.92,1706.69 J9.11
SPI_EXT_CS2: J9.12 J13.3 | length 769.2
  Bottom Layer w15: J13.3 187.01,1633.86 793.17,1633.86 804.88,1645.57 804.88,1702.32 J9.12
SPI_EXT_CS3: J9.13 J13.6 | length 708.8
  Bottom Layer w15: J13.6 797.24,1574.8 856.3,1633.86 856.3,1703.74 J9.13
SPI_EXT_MISO: J9.15 J13.5 | length 879.8
  Bottom Layer w15: J13.5 816.93,1456.69 959.25,1599.02 J9.15
SPI_EXT_MOSI: J9.14 J13.2 | length 935.1
  Bottom Layer w15: J13.2 177.17,1525.59 216.54,1525.59 217.32,1524.8 825.98,1524.8 909.25,1608.07 J9.14
SPI_EXT_SCK: J9.16 J13.1 | length 1102.2
  Bottom Layer w15: J13.1 187.01,1397.64 816.93,1397.64 1009.25,1589.96 J9.16
UART_SENS_RX: J5.9 J16.1 | length 1282
  Bottom Layer w20: J16.1 127.95,974.41 177.17,925.2 974.41,925.2 1159.25,740.35 J5.9
UART_SENS_TX: J5.10 J16.2 | length 1398.3
  Bottom Layer w20: J16.2 187.01,1102.36 187.01,990.57 226.38,951.2 985.18,951.2 1204.88,731.49 1204.88,659.88 J5.10
Vbat: C6.1 C7.1 C8.1 C9.1 C10.1 C11.1 J11.1 R1.1 U1.VIN
pads on no net: J1.2 J5.21 J9.21 U1.ADJ U1.ADRI U1.ADRO U1.EAO U1.EN U1.NC U1.PGD U1.SCL U1.SDA U1.SYNCO U1.TRK U1.VDR

## Polygon pours and split planes (outlines as drawn)
GND on Top Layer "NONET_L01_P005" (solid, shelved, pour order 5): 19.68,19.68 19.68,2342.52 1948.82,2342.52 1948.82,19.68
+5V on Top Layer "+5V_L01_P001" (solid, pour order 1): 974.41,1092.52 984.25,1102.36 984.25,1200.79 974.41,1210.63 698.82,1210.63 688.98,1220.47 688.98,1978.35 816.93,2106.3 1358.27,2106.3 1397.64,2145.67 1397.64,2185.04 1358.27,2224.41 482.28,2224.41 442.91,2185.04 442.91,2037.4 511.81,1968.5 511.81,1604.33 501.97,1594.49 501.97,1200.79 511.81,1190.94 511.81,1062.99 521.65,1053.15 669.29,1053.15 708.66,1092.52
Vbat on Top Layer "VBAT_L01_P002" (solid, pour order 2): 1062.99,925.2 1072.83,935.04 1250,935.04 1259.84,944.88 1525.59,944.88 1545.28,925.2 1545.28,708.66 1614.17,639.76 1614.17,492.13 1574.8,452.76 1279.53,452.76 1230.32,501.97 1141.73,501.97 1131.89,511.81 1131.89,767.72 1102.36,797.24 1072.83,797.24 1062.99,807.09
NetL1_1 on Top Layer "NETL1_1_L01_P000" (solid, pour order 0): 1023.62,925.2 1013.78,935.04 541.34,935.04 521.65,915.35 521.65,777.56 531.5,767.72 777.56,767.72 826.77,807.09 836.61,807.09 1013.78,807.09 1023.62,816.93
GND on Bottom Layer "NONET_L02_P003" (solid, shelved, pour order 3): 19.68,19.68 19.68,2342.52 1948.82,2342.52 1948.82,19.68

## Silkscreen, mask and mechanical layers (free items; w line width, h text height)
Top Overlay:
  lines w10: 523.62,799.21 442.91,799.21 442.91,1181.1 523.62,1181.1 ; 673.23,799.21 748.03,799.21 748.03,1181.1 673.23,1181.1
  text "8" at 521.5,1988.03 h60 r180
  text "7" at 659.29,1988.03 h60 r180
  text "5" at 934.88,1988.03 h60 r180
  text "3" at 1210.47,1988.03 h60 r180
  text "2" at 1348.27,1988.03 h60 r180
  text "1" at 1476.22,1988.03 h60 r180
  text "6" at 801.02,1982.13 h60 r180
  text "4" at 1072.68,1978.19 h60 r180
  text "SPI" at 384.02,1948.66 h60 r270
  text "Servo/PWM" at 1249.84,1899.45 h60 r180
  text "MoonPilot" at 816.93,1635.23 h180
  text "EXT I2C" at 1574.65,1555.28 h60 r90
  text "Power" at 816.93,1546.5 h160
  text "Rev A" at 816.93,1477.29 h120
  text "TLM" at 372.2,1202.6 h60 r270
  text "GPIO" at 1564.8,1161.57 h60 r90
  text "Airspd" at 372.51,875.83 h60 r270
  text "RC" at 1614.02,876.14 h60 r90
  text "+" at 1427.64,868.72 h150 r180
  text "-" at 1874.76,847.38 h150 r180
  text "Hi Current" at 482.44,472.6 h60
  text "4" at 1289.53,384.02 h60
  text "1" at 531.65,374.17 h60
  text "2" at 817.09,374.17 h60
  text "3" at 1102.52,364.33 h60
Bottom Overlay:
  text "Máni Magnússon" at 1299.21,1572.61 h120